# EAGLE board RF1 (EAGLE 7.2.0)
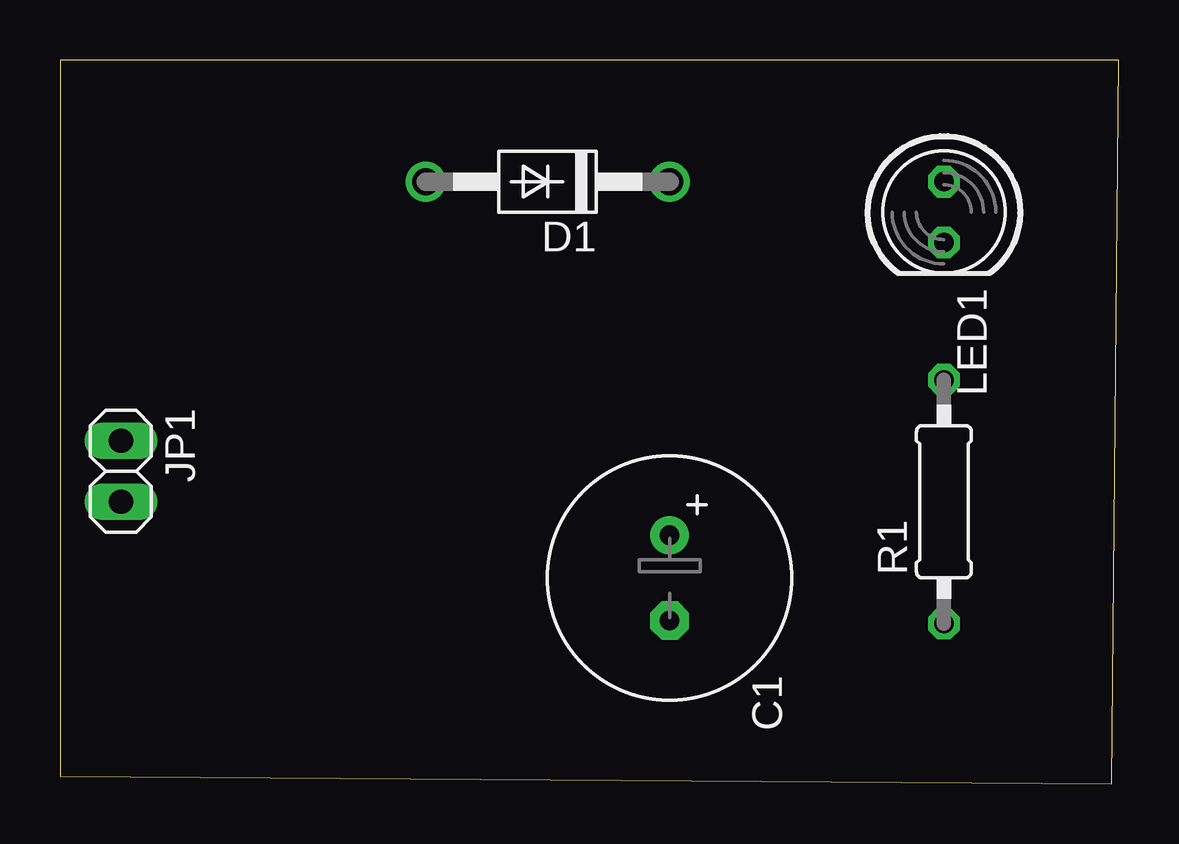
[diagram p0: board, top side]
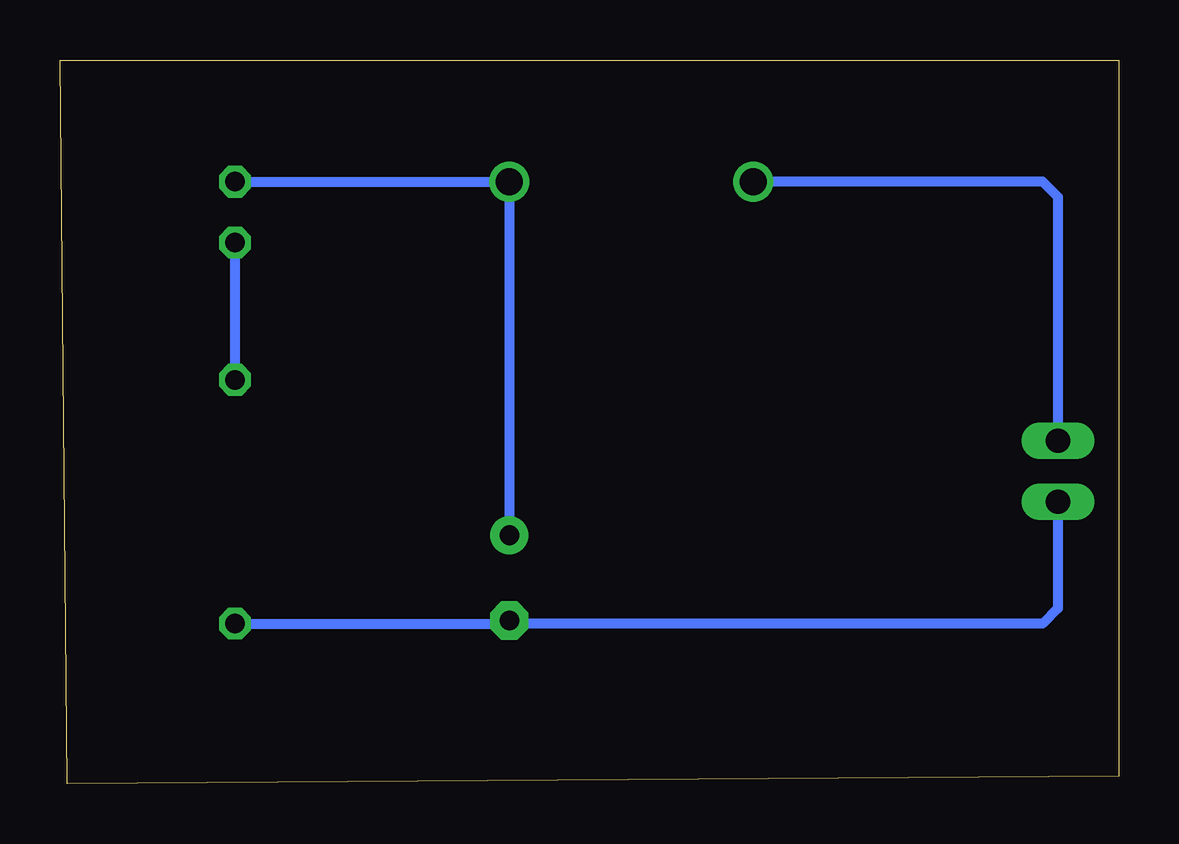
[diagram p1: board, bottom side, seen from below]

Size 44.12 x 30.17 mm. Coordinates in mm from the lower left corner, seen from the top.
Outline: 0,0.33 43.81,0 44.12,30.17 0,30.17 0,0.33
Copper layers (1*16): Top 0.035mm / dielectric 1.5mm / Bottom 0.035mm
Design rules "default": minimum track width 10mil, minimum drill 24mil, track to track 8mil, track to pad 8mil, pad to pad 8mil, via to via 8mil, smd to smd 8mil, copper to edge 40mil, drill to drill 8mil, minimum pad ring 10mil, minimum via ring 8mil, stop-mask expansion 4mil, vias tented up to drill 0mil, thermal gap 10mil

## Footprints (pad centres in the part's own frame; a part is rotated, then mirrored left to right if it is on the bottom)
E3,5-10 = drill 0.813 pad 1.6: + -1.778,0 | drill 0.813 pad 1.6 octagon: - 1.778,0
DO41-10 = drill 1.118: A 5.08,0; C -5.08,0
1X02 = drill 1.016 long: 1 -1.27,0; 2 1.27,0
LED5MM = drill 0.813 octagon: A -1.27,0; K 1.27,0
0207/10 = drill 0.813 octagon: 1 -5.08,0; 2 5.08,0

## Placement (x,y rotation side)
C1  [E3,5-10]  25.4,8.59 270 top
D1  1N4004  [DO41-10]  20.32,25.09 180 top
JP1  [1X02]  2.54,13.03 270 top
LED1  [LED5MM]  36.83,23.82 270 top
R1  [0207/10]  36.83,11.76 90 top

## Library data of the parts
C1 R1 = rcl
D1 = diode
JP1 = pinhead
LED1 = led

## Nets
N$1: D1.A JP1.1
N$3: LED1.K R1.2
N$4: C1.- JP1.2 R1.1
N$5: C1.+ D1.C LED1.A

## Tracks (layer width: path | path; a pad name or v marks a point on that pad's centre or on a via)
N$1
  Bottom 0.406: D1.A 3.18,25.09 2.54,24.46 JP1.1
N$3
  Bottom 0.406: LED1.K R1.2
N$4
  Bottom 0.406: R1.1 25.53,6.68 | 25.53,6.68 C1.- | JP1.2 2.54,7.32 3.18,6.68 25.53,6.68
N$5
  Bottom 0.406: C1.+ D1.C LED1.A